# Altium PCB ATGuard SimpleV11.PcbDoc
Units mm, origin at the board's own origin, x right, y up, seen from the top; angles counter-clockwise.
Board outline 97 x 18.8 mm, 2 copper layers (Top Layer, Bottom Layer), stack 1.071 mm thick; 83 components, 47 nets, 263 pads, 90 vias.
Unrouted connection lines stored in the file: 12.
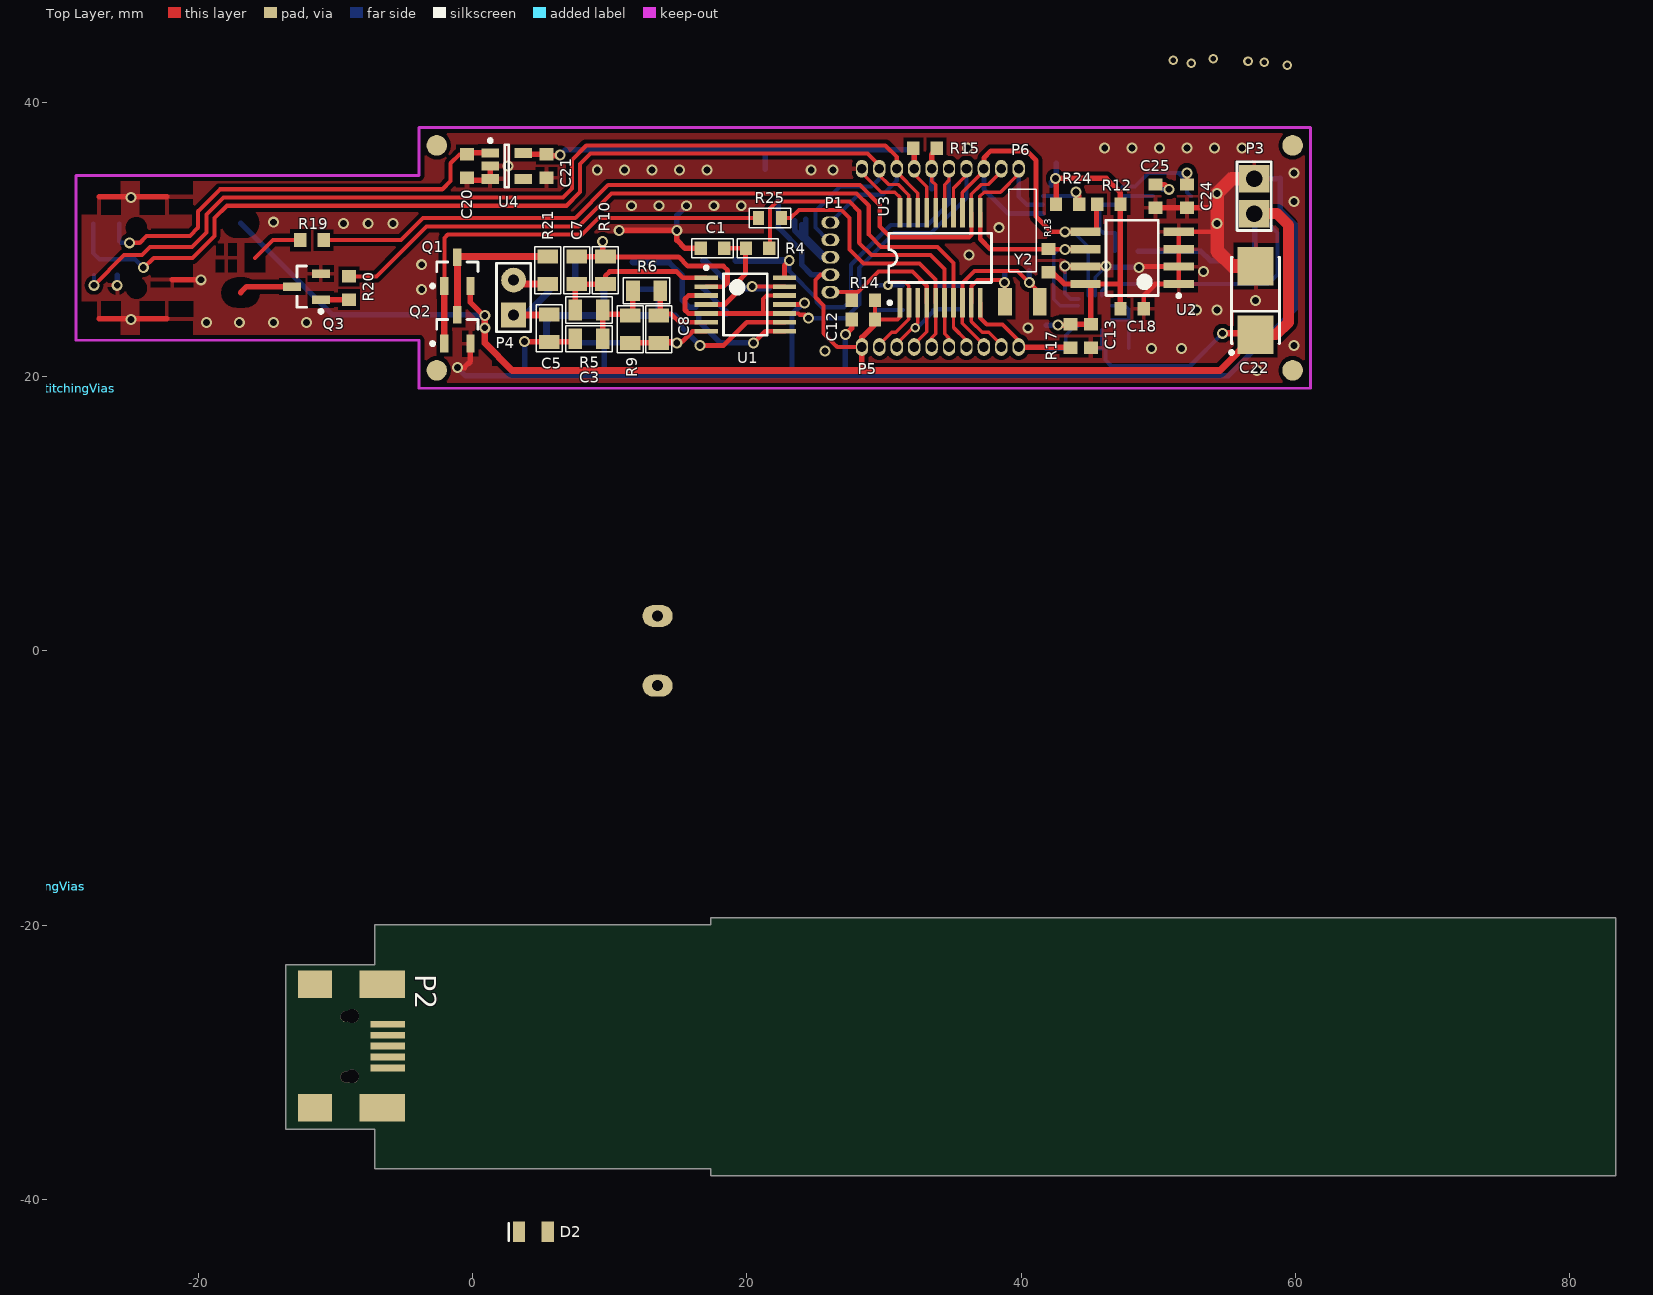
[diagram p0: Top Layer view]
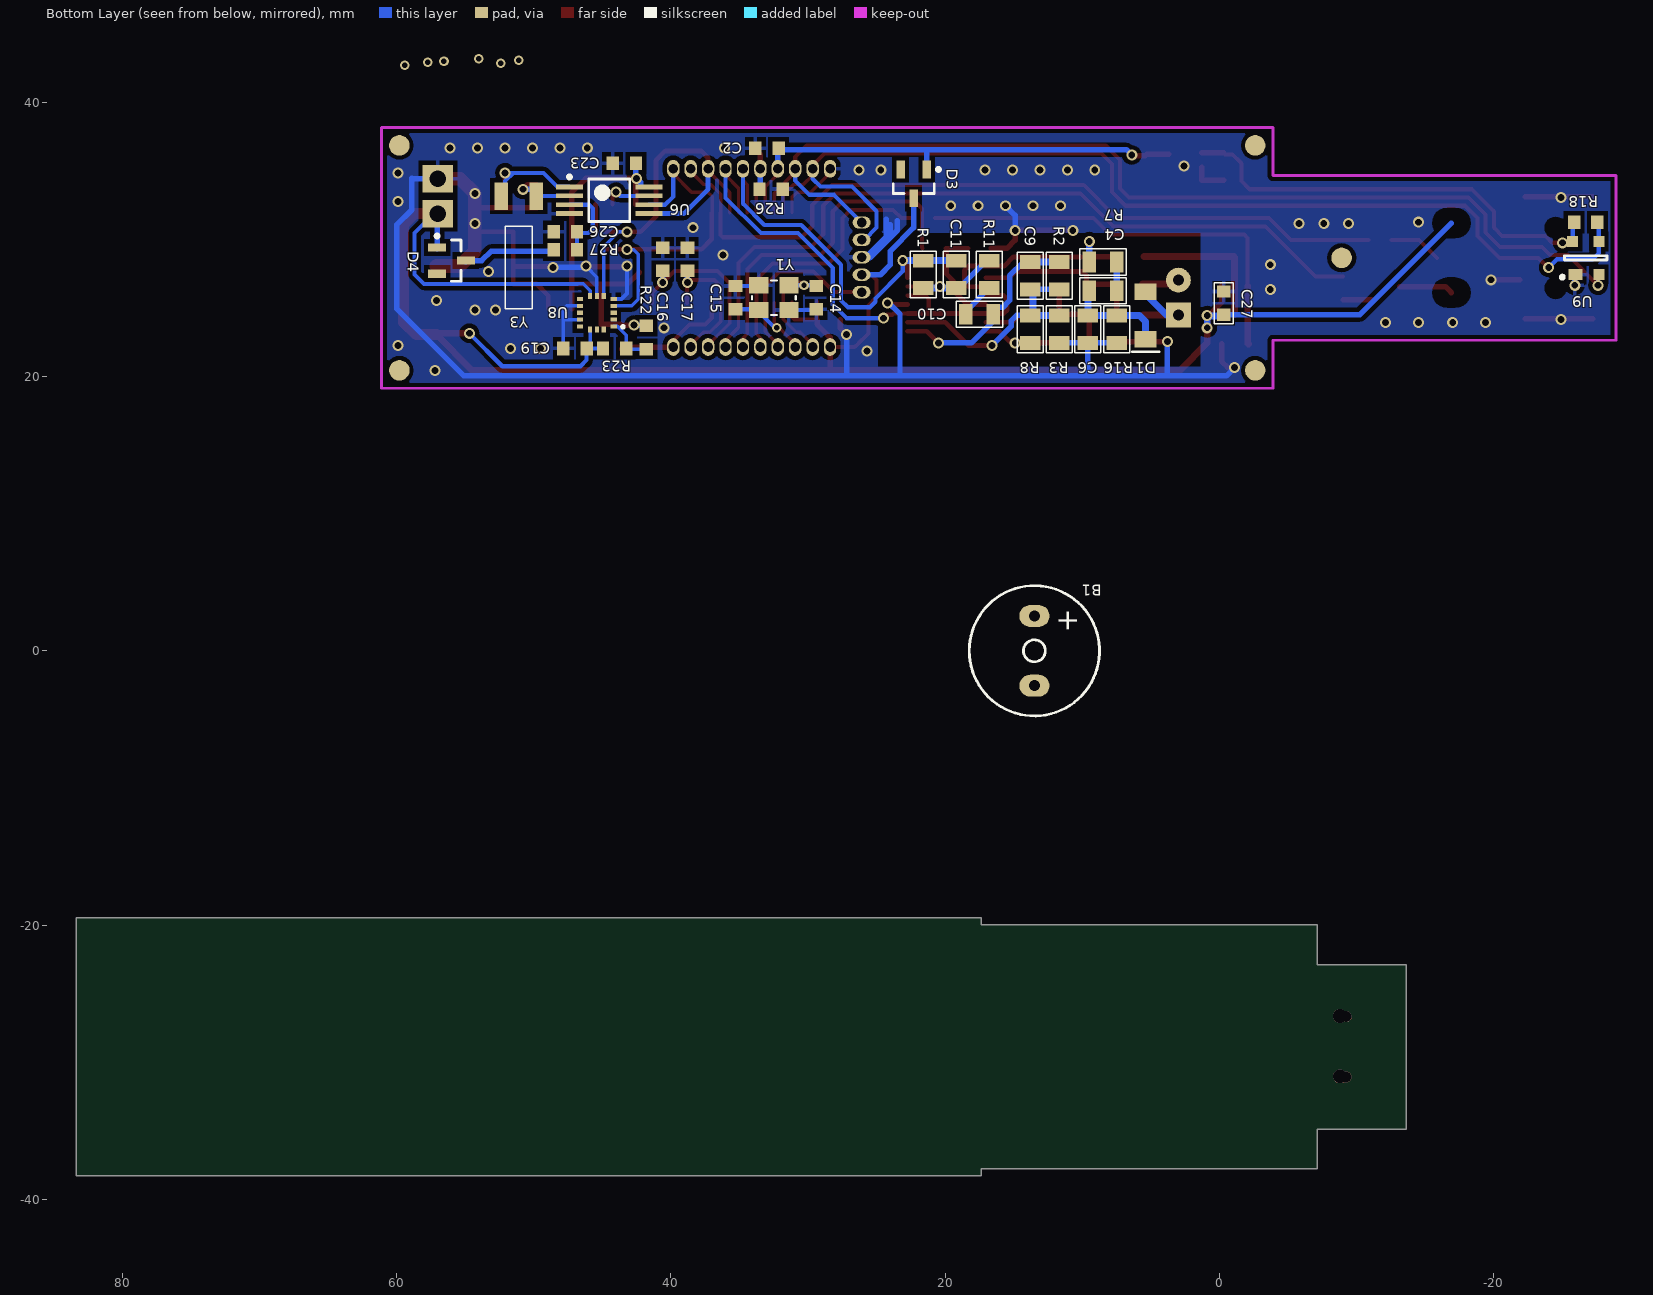
[diagram p1: Bottom Layer view, seen from below]

## Layer stack, top to bottom
Top Layer: signal copper 0.0356
Dielectric: core 1, FR-4, Dk 4.8
Bottom Layer: signal copper 0.0356

## Board outline
17.375,-37.775 17.375,-38.275 83.375,-38.275 83.375,-19.475 17.375,-19.475 17.375,-19.975 -7.125,-19.975 -7.125,-22.875 -13.625,-22.875 -13.625,-34.875 -7.125,-34.875 -7.125,-37.775

## Design rules (kind name [scope] priority, off if disabled: settings)
Clearance Clearance_1 [InNamedPolygon('Direct Connect 8') Or  InNamedPolygon('Direct Connect 1') Or  InNamedPolygon('Direct Connect 11') Or  InNamedPolygon('Direct Connect 4') Or  InNamedPolygon('Direct Connect 5') Or  InNamedPolygon('Direct Connect 7') Or  InNamedPolygon('Direct Connect 10') Or  InNamedPolygon('Direct Connect 9') Or  InNamedPolygon('Direct Connect 2') Or  InNamedPolygon('Direct Connect 6') Or  InNamedPolygon('Direct Connect 3')] p1: gap=0.25
Clearance StitchingVias-Internal [InComponent('StitchingVias') vs InComponent('StitchingVias')] p2: gap=0.3 // Clearance between Stitching Vias
Clearance StitchingVias-Electrical [InComponent('StitchingVias') vs OnSignal] p3: gap=0.3 // Clearance between Stitching Vias and Electrical Objects
Clearance StitchingVias-Board [InComponent('StitchingVias') vs OnLayer('Keep-Out Layer')] p4: gap=0.3 // Clearance between Stitching Vias and Board Outline
Clearance [All] p5: gap=0.3
ComponentClearance StitchingVias-Comp [InComponent('StitchingVias')] p1: gap=0 collisioncheckmode=3 verticalgap=0 showdistances=FALSE // Clearance between "StitchingVias" Component and other Components
ComponentClearance [All] p2: gap=0.254 collisioncheckmode=3 verticalgap=0.254 showdistances=FALSE
HoleSize [All] p1: absolutevalues=TRUE maxlimit=2.54 minlimit=0.2 maxpercent=80.000 minpercent=20.000
HoleToHoleClearance [All] p1: gap=0.1 allowstackedmicrovias=TRUE
MinimumSolderMaskSliver [All] p1: minsoldermaskwidth=0
NetAntennae [All] p1: netantennaetolerance=0.1
PlaneClearance [All] p1: clearance=0.25
PlaneConnect StitchingVias-Plane [InComponent('StitchingVias')] p1: planeconnectstyle=Direct reliefexpansion=0.508 reliefentries=4 reliefconductorwidth=0.254 reliefairgap=0.254 // Power plane connect style rule for Stitching Vias
PlaneConnect [All] p2: planeconnectstyle=Relief reliefexpansion=0.508 reliefentries=4 reliefconductorwidth=0.254 reliefairgap=0.254
PolygonConnect PolygonConnect_3 [All vs IsNamedPolygon('Direct Connect 8') Or  IsNamedPolygon('Direct Connect 1') Or  IsNamedPolygon('Direct Connect 11') Or  IsNamedPolygon('Direct Connect 4') Or  IsNamedPolygon('Direct Connect 5') Or  IsNamedPolygon('Direct Connect 7') Or  IsNamedPolygon('Direct Connect 10') Or  IsNamedPolygon('Direct Connect 9') Or  IsNamedPolygon('Direct Connect 2') Or  IsNamedPolygon('Direct Connect 6') Or  IsNamedPolygon('Direct Connect 3')] p1: connectstyle=Direct reliefconductorwidth=0.254 reliefentries=4 polygonreliefangle="90 Angle"
PolygonConnect PolygonConnect_2 [All vs IsNamedPolygon('Top VBAT') Or  IsNamedPolygon('Bottom VBAT') Or  IsNamedPolygon('Top VBAT')] p2: connectstyle=Direct reliefconductorwidth=0.254 reliefentries=4 polygonreliefangle="90 Angle"
PolygonConnect StitchingVias-Poly [InComponent('StitchingVias')] p3: connectstyle=Direct reliefconductorwidth=0.254 reliefentries=4 polygonreliefangle="90 Angle" // Polygon connect style rule for Stitching Vias
PolygonConnect PolygonConnect_1 [All vs IsNamedPolygon('Top Full')] p4: connectstyle=Relief reliefconductorwidth=0.254 reliefentries=4 polygonreliefangle="90 Angle"
PolygonConnect [All] p5: connectstyle=Relief reliefconductorwidth=0.3 reliefentries=4 polygonreliefangle="90 Angle"
RoutingVias StitchingVias-ViaStyle [InComponent('StitchingVias')] p1: holewidth=0.4 width=0.6 viastyle="Through Hole" minholewidth=0.3 minwidth=0.5 maxholewidth=0.6 maxwidth=1 // Via style rule for Stitching Vias
RoutingVias [All] p2: holewidth=0.4 width=0.7 viastyle="Through Hole" minholewidth=0.4 minwidth=0.7 maxholewidth=0.711 maxwidth=1.27
SilkToSilkClearance [All] p1: silktosilkclearance=0
SilkscreenOverComponentPads [All] p1: minsilkscreentomaskgap=0
SolderMaskExpansion [All] p1: expansion=0
TestPointUsage [All] p1: valid=0 allowmultiple=FALSE
Testpoint [All] p1: side=15 testpointundercomponent=TRUE minsize=1.016 maxsize=2.54 preferedsize=1.524 minholesize=0 maxholesize=1.016 preferedholesize=0.813 testpointgrid=0.025 style=1023 order=0123456789
Width [All] p1: maxlimit=1 minlimit=0.2 preferedwidth=0.3
15 further rules are at their usual default settings.

## Classes and differential pairs
component class "AT Guard Simple Main": B1 C1 C2 C12 C13 C14 C15 C16 C17 D2 P1 P2 P5 P6 Q3 R4 R12 R13 R14 R15 R17 R18 R19 R20 R26 U3 U9 Y1 Y2
component class "AT Guard Simple Memory": C18 U2
component class "AT Guard Simple Mems": C19 R22 R23 U8
component class "AT Guard Simple Power": C20 C21 C22 D3 P3 U4
component class "AT Guard Simple RTC": C23 C24 C25 C26 D4 R24 R27 U6 Y3
component class RF_125KHz: C3 C4 C5 C6 C7 C8 C9 C10 C11 C27 D1 P4 Q1 Q2 R1 R2 R3 R5 R6 R7 R8 R9 R10 R11 R16 R21 R25 U1

## Components (designator, comment, footprint, x,y, rotation, side; value= is the part's Value field where it differs from the comment)
B1 "Buzzer 5V r=12mm, h=7.5 mm" "Buzzer 9x5.5 mm" 13.5,0 r270 bottom
C1 "Cap" 3-0603_N#1 17.5,29.35 r0 top
C2 "Cap" 3-0603_L 33,36.65 r180 bottom
C3 "Cap" 6-0805_N 8.5,22.75 r0 top
C4 "Cap" 6-0805_N 8.5,26.25 r0 bottom
C5 "Cap" 6-0805_N 5.61,23.52 r270 top
C6 "Cap" 6-0805_N 9.6,23.45 r270 bottom
C7 "Cap" 6-0805_N 7.6,27.75 r270 top
C8 "Cap" 6-0805_N 13.6,23.45 r270 top
C9 "Cap" 6-0805_N 13.8,27.35 r90 bottom
C10 "Cap" 6-0805_N 17.5,24.55 r0 bottom
C11 "Cap" 6-0805_N 19.2,27.45 r90 bottom
C12 "Cap" 3-0603_L 28.5,24.15 r0 top
C13 "Cap" 3-0603_L 45.1,22.95 r90 top
C14 "Cap" 3-0603_L 29.4,25.75 r90 bottom
C15 "Cap" 3-0603_L 35.3,25.75 r270 bottom
C16 "Cap" 3-0603_L 40.6,28.55 r270 bottom
C17 "Cap" 3-0603_L 38.8,28.55 r270 bottom
C18 "Cap" 3-0603_L 48.1,24.95 r180 top
C19 "Cap" 3-0603_L 47,22.05 r0 bottom
C20 "Cap" 3-0603_L -0.4,35.35 r90 top
C21 "Cap" 3-0603_L 5.4,35.35 r90 top
C22 "CAP-Tantal" C 57.1,25.55 r90 top
C23 "Cap" 3-0603_L 43.4,35.55 r0 bottom
C24 "Cap" 3-0603_L 52.1,33.15 r90 top
C25 "Cap" 3-0603_L 49.8,33.15 r90 top
C26 "Cap" 3-0603_L 47.7,30.55 r180 bottom
C27 "Cap" 3-0603_N#1 -0.3,25.35 r270 bottom
D1 "LL4148" "DL-35 - S" 5.4,24.45 r270 bottom
D2 "LED" "6-0805 - LED" 4.45,-42.35 r180 top
D3 "BAT54C" SOT23_N 22.3,34.05 r270 bottom
D4 "BAT54C" SOT23_N 56,28.45 r180 bottom
P1 "Header 5pin" "Header 1.27mm 5P" 26.1,26.15 r90 top
P2 "USB Mini B" "USB Mini B Female_N 2" -8.775,-28.825 r270 top
P3 "Header 2H" "HDR1X2H-180 derece"#1 57,33.15 r90 top
P4 "Header 2H" "HDR1X2H-180 derece"#2 3,25.76 r90 top
P5 "Header 10" "Header 1.27mm 10P" 28.4,22.15 r0 top
P6 "Header 10" "Header 1.27mm 10P" 28.4,35.15 r0 top
Q1 "BSS84" SOT23_N -1.1,27.65 r90 top
Q2 "2N7002" SOT23_N -1.1,23.45 r90 top
Q3 "BC817-40" SOT23_N -12.1,26.55 r180 top
R1 "Res1" 6-0805_N 21.6,27.45 r90 bottom
R2 "Res1" 6-0805_N 11.7,27.35 r270 bottom
R3 "Res1" 6-0805_N 11.7,23.45 r270 bottom
R4 "Res1" 3-0603_N#1 20.8,29.35 r180 top
R5 "Res1" 6-0805_N 8.5,24.85 r180 top
R6 "Res1" 6-0805_N 12.7,26.25 r180 top
R7 "Res1" 6-0805_N 8.5,28.35 r180 bottom
R8 "Res1" 6-0805_N 13.8,23.45 r270 bottom
R9 "Res1" 6-0805_N 11.5,23.45 r90 top
R10 "Res1" 6-0805_N 9.7,27.75 r90 top
R11 "Res1" 6-0805_N 16.8,27.45 r90 bottom
R12 "Res1" 3-0603_L 46.4,32.55 r0 top
R13 "Res1" 3-0603_L 42,28.45 r270 top
R14 "Res1" 3-0603_L 28.5,25.55 r0 top
R15 "Res1" 3-0603_L 33,36.65 r180 top
R16 "Res1" 6-0805_N 7.5,23.45 r90 bottom
R17 "Res1" 3-0603_L 43.6,22.95 r90 top
R18 "Res1" 3-0603_L -26.7,31.25 r0 bottom
R19 "Res1" 3-0603_L -11.7,29.95 r0 top
R20 "Res1" 3-0603_L -9,26.45 r90 top
R21 "Res1" 6-0805_N 5.5,27.75 r270 top
R22 "Res1" 3-0603_L 41.8,22.85 r270 bottom
R23 "Res1" 3-0603_L 44.1,22.05 r180 bottom
R24 "Res1" 3-0603_L 43.4,32.55 r0 top
R25 "Res1" 3-0603_N#2 21.7,31.55 r180 top
R26 "Res1" 3-0603_L 32.7,33.65 r0 bottom
R27 "Res1" 3-0603_L 47.7,29.25 r180 bottom
StitchingVias "Component That Holds Stitching Vias" ? -28.9,19.15 r0 top locked
StitchingVias "Component That Holds Stitching Vias" ? -31.1,-17.15 r0 top locked
StitchingVias "Component That Holds Stitching Vias" ? -31.1,-17.15 r0 top locked
StitchingVias "Component That Holds Stitching Vias" ? -31.1,-17.15 r0 top locked
StitchingVias "Component That Holds Stitching Vias" ? -28.9,19.15 r0 top locked
U1 "#NAME?" TSSOP-14N 19.9,25.25 r0 top
U2 "24FC1025-I/SM" SOIJ-SM8_N 48.1,28.65 r180 top
U3 "PIC18LF14K50-I/SS" SSOP-20 34.1,28.65 r0 top
U4 "TPS76933 3.3V LDO" SOT-23-CH5_M 2.5,35.35 r0 top
U6 "MCP79402" TSSOP-ST8_M 44.5,32.85 r180 bottom
U8 "LIS3DH" "LGA 16" 45.4,24.65 r0 bottom
U9 "PRTR5V0U2X" SOT-143B -26.7,28.65 r270 bottom
Y1 "Crystal Oscillator" "3.2x2.5 mm SMD CRYSTAL" 32.5,25.75 r0 bottom
Y2 "XTAL_SMT" "32768 SMT 2.1x6.2mm Crystal" 40.1,25.45 r180 top
Y3 "XTAL_SMT" "32768 SMT 2.1x6.2mm Crystal" 51.1,33.15 r180 bottom

## Footprints (in the part's own frame and the unit in brackets; to place one, negate y for a bottom-side part, rotate by r counter-clockwise, add the part's x,y. Pads: shape width x height; smd on the part's side, far side on the other; paste and mask are expansions set on the pad)
3-0603_L [mm] "Chip Resistor; Body 1.6 x 0.9 mm (LxW typ)"
  rect 0.9x1 smd: 1(-0.85,0) 2(0.85,0)
  body extent -0.81,-0.41 0.81,0.41, height 0.46
3-0603_N#1 [mm] "Chip Resistor; Body 1.6 x 0.9 mm (LxW typ)"
  rect 0.9x1 smd: 1(-0.85,0) 2(0.85,0)
  silkscreen extent -1.5,-0.7 1.5,0.7, body extent -0.81,-0.41 0.81,0.41, height 0.46
3-0603_N#2 [mm] "Chip Resistor; Body 1.6 x 0.9 mm (LxW typ)"
  rect 0.8x1 smd: 1(-0.85,0) 2(0.85,0)
  silkscreen extent -1.5,-0.7 1.5,0.7, body extent -0.81,-0.41 0.81,0.41, height 0.46
"3.2x2.5 mm SMD CRYSTAL" [mm] "3.2x2.5 mm SMD CRYSTAL"
  rect 1.4x1.2 smd: 1(-1.1,-0.9) 2(1.1,-0.9) 3(1.1,0.9) 4(-1.1,0.9)
  silkscreen extent -1.6,-1.25 1.6,1.25, body extent -1.6,-1.25 1.6,1.25, height 0.77
"6-0805 - LED" [mm] "Chip LED"
  rect 0.9x1.5 smd: 1(-1.05,0) 2(1.05,0)
  silkscreen extent 1.8,-0.6 1.8,0.65, body extent -1.03,-0.45 1.03,0.46, height 0.85
6-0805_N [mm] "Chip Resistor; Body 2 x 1.2 mm (LxW typ)"
  rect 1x1.5 smd: 1(-1,0) 2(1,0)
  silkscreen extent -1.7,-0.95 1.7,0.95, body extent -1.01,-0.63 1.01,0.64, height 0.61
"32768 SMT 2.1x6.2mm Crystal" [mm] "32768 SMT 2.1x6.2mm Crystal"
  rect 1x2 smd: 1(-1.27,0) 2(1.27,0)
  silkscreen extent -1,-8.2 1,-2.2, body extent -1.53,-8.17 1.53,0.81, height 2
"Buzzer 9x5.5 mm" [mm]
  oval 1.6x2.2 hole 0.8: 1(-2.54,0) 2(2.54,0)
  silkscreen extent -4.75,-4.75 4.75,4.75, body extent -4.41,-4.52 4.59,4.48, height 4.5
C [mm] "Capacitor, SM Tantalum; Body 6.0 x 3.2 mm (LxW typ)"
  rect 2.8x2.6 smd: 1(-2.5,0) 2(2.5,0)
  silkscreen extent -3.92,-1.75 3.15,1.87, body extent -3.8,-1.75 3.79,1.76, height 2.79
"DL-35 - S" [mm]
  rect 1.2x1.6 smd: 1(-1.725,0) 2(1.725,0)
  silkscreen extent 2.64,-0.95 2.64,0.98, body extent -1.76,-0.75 1.74,0.75, height 1.5
"HDR1X2H-180 derece"#1 [mm] "Connector; Header; 2 Position; Right Angle"
  rect 2x2.2 hole 1.2: 1(-1.27,0) 2(1.27,0)
  silkscreen extent -2.5,-1.25 2.5,1.25, body extent -2.53,-1.28 2.55,1.26, height 8.49
"HDR1X2H-180 derece"#2 [mm] "Connector; Header; 2 Position; Right Angle"
  rect 1.8x1.8 hole 0.8: 1(-1.27,0)
  round 1.8 hole 0.8: 2(1.27,0)
  silkscreen extent -2.5,-1.25 2.5,1.25, body extent -2.53,-1.28 2.55,1.26, height 8.49
"Header 1.27mm 5P" [mm] "5 pin header 1.27mm"
  oval 0.9x1.3 hole 0.7: 1(0,0) 2(1.27,0) 3(2.54,0) 4(3.81,0) 5(5.08,0)
"Header 1.27mm 10P" [mm] "10 pin header 1.27mm"
  oval 0.9x1.3 hole 0.7: 1(0,0) 2(1.27,0) 3(2.54,0) 4(3.81,0) 5(5.08,0) 6(6.35,0) 7(7.62,0) 8(8.89,0) 9(10.16,0) 10(11.43,0)
"LGA 16" [mm] "LGA 16"
  rect 0.45x0.3 smd: 1(-1.225,1) 2(-1.225,0.5) 3(-1.225,0) 4(-1.225,-0.5) 5(-1.225,-1) 9(1.225,-1) 10(1.225,-0.5) 11(1.225,0) 12(1.225,0.5) 13(1.225,1)
  rect 0.3x0.45 smd: 6(-0.5,-1.225) 7(0,-1.225) 8(0.5,-1.225) 14(0.5,1.225) 15(0,1.225) 16(-0.5,1.225)
  silkscreen extent -2,0.93 -1.8,1.12, body extent -1.5,-1.5 1.5,1.5, height 1.01
SOIJ-SM8_N [mm] "SOP, 8-Leads, Body 5.2x5.2mm, Pitch 1.27mm, IPC Medium Density"
  rect 2.2x0.6 smd: 1(-3.4,1.905) 2(-3.4,0.635) 3(-3.4,-0.635) 4(-3.4,-1.905) 5(3.4,-1.905) 6(3.4,-0.635) 7(3.4,0.635) 8(3.4,1.905)
  silkscreen extent -3.52,-2.75 1.9,2.88, body extent -2.73,-2.75 2.73,2.75, height 2.04
SOT23_N [mm] "SOT23, 3-Leads, Body 2.9x1.3mm, Pitch 0.95mm, Lead Span 2.3mm, IPC Medium Density"
  rect 1.3x0.6 smd: 1(-1.05,0.95) 2(-1.05,-0.95) 3(1.05,0)
  silkscreen extent -1.17,-1.5 0.7,1.92, body extent -1.25,-1.5 1.25,1.5, height 1.05
SOT-23-CH5_M [mm] "SOT23, 6-Leads, Body 2.9x1.6mm, Pitch 0.95mm, Lead Span 2.7mm, IPC Low Density"
  rect 1.3x0.65 smd: 1(-1.2,0.95) 2(-1.2,0)
  rect 1.3x0.7 smd: 3(-1.2,-0.95) 4(1.2,-0.95) 5(1.2,0.95)
  silkscreen extent -1.32,-1.55 0.15,1.97, body extent -1.5,-1.49 1.5,1.51, height 1.3
SOT-143B [mm] "SOT143B"
  rect 0.8x1 smd: 1(1.22,-0.75)
  rect 0.8x0.8 smd: 2(1.2,0.95) 3(-1.2,0.95) 4(-1.2,-0.95)
  silkscreen extent -0.15,-1.84 1.53,1.55, body extent -1.21,-1.46 1.21,1.46, height 1
SSOP-20 [mm]
  rect 0.35x2.15 smd: 1(-2.925,-3.275) 2(-2.275,-3.275) 3(-1.625,-3.275) 4(-0.975,-3.275) 5(-0.325,-3.275) 6(0.325,-3.275) 7(0.975,-3.275) 8(1.625,-3.275) 9(2.275,-3.275) 10(2.925,-3.275) 11(2.925,3.275) 12(2.275,3.275) 13(1.625,3.275) 14(0.975,3.275) 15(0.325,3.275) 16(-0.325,3.275) 17(-0.975,3.275) 18(-1.625,3.275) 19(-2.275,3.275) 20(-2.925,3.275)
  silkscreen extent -3.8,-3.4 3.75,1.8, body extent -3.66,-3.95 3.66,3.95, height 1.78
TSSOP-14N [mm] "TSOP, 14-Leads, Body 4.5x4.3mm (max), Pitch 0.65mm, IPC Medium Density"
  rect 1.7x0.35 smd: 1(-2.85,1.95) 2(-2.85,1.3) 3(-2.85,0.65) 4(-2.85,0) 5(-2.85,-0.65) 6(-2.85,-1.3) 7(-2.85,-1.95) 8(2.85,-1.95) 9(2.85,-1.3) 10(2.85,-0.65) 11(2.85,0) 12(2.85,0.65) 13(2.85,1.3) 14(2.85,1.95)
  silkscreen extent -2.97,-2.25 1.6,2.8, body extent -3.2,-2.5 3.2,2.5, height 1.1
TSSOP-ST8_M [mm] "TSOP, 8-Leads, Body 3x4.4mm, Pitch 0.65mm, IPC Low Density"
  rect 2x0.35 smd: 1(-2.9,0.975) 2(-2.9,0.325) 3(-2.9,-0.325) 4(-2.9,-0.975) 5(2.9,-0.975) 6(2.9,-0.325) 7(2.9,0.325) 8(2.9,0.975)
  silkscreen extent -3.03,-1.55 1.5,1.82, body extent -3.14,-1.58 3.14,1.42, height 1.09
"USB Mini B Female_N 2" [mm] "USB Mini B Female Connector"
  round 1 hole 1 unplated: 0(-2.2,0) 0(2.2,0)
  rect 0.5x2.5 smd: 1(-1.6,2.6) 2(-0.8,2.6) 3(0,2.6) 4(0.8,2.6) 5(1.6,2.6)
  rect 2x3.3 smd: 6(-4.5,2.2) 6(4.5,2.2)
  rect 2x2.5 smd: 6(-4.5,-2.7) 6(4.5,-2.7)
  body extent -5.35,-5.89 5.35,3.3, height 3.95
? [mm]

## Part data
B1: library part Buzzer_
C1 C2 C3 C4 C5 C6 C7 C8 C9 C10 C11 C12 C13 C14 C15 C16 C17 C18 C19 C20 C21 C23 C24 C25 C26 C27: "Capacitor"
C22: "Tantamount Military, Surface Mount MIL-PRF-55365/8 Qualified Solid Tantalum Chip Capacitor: 6.8uF, 20% Tolerance, 6 WVDC @ +85°C, Surge = 8V"
D1: "1 Amp General Purpose Rectifier"
D2: "Typical INFRARED GaAs LED"
D3 D4: "2x200 mA Shottky Rectifier"
P1: library part "Header 5 pin", "Header 5-Pin"
P3 P4: "Header, 2-Pin, Right Angle"
P5 P6: "Header, 10-Pin"
Q1: "P-channel Enhancement Mode Vertical D-MOSFET"
Q2: "N-channel Enhancement Mode Field-effect Transistor"
Q3: "NPN General-purpose Transistor"
R1 R2 R3 R4 R5 R6 R7 R8 R9 R10 R11 R12 R13 R14 R15 R16 R17 R18 R19 R20 R21 R22 R23 R24 R25 R26 R27: "Resistor"
U1: library part LMV324IPWR, "IC OPAMP GP R-R 1MHZ 14TSSOP"
U2: "1 Mbit, 1MHz, 2.5V, I2C Serial EEPROM, 8-Pin SOIC 208mil, Industrial Temperature"
U3: "High Performance, Enhanced FLASH Microcontroller with 10-Bit A/D and nanoWatt Technology, 8K FLASH, 20-Pin SSOP, Standard Volt Range, Industrial Temperature"
U6: "MCP79402 RTC,I2C"
U8: "3-axis - ±2g analog output “nano” accelerometer"
U9: "Ultra low capacitance double rail-to-rail ESD protection diode"
Y2 Y3: "Crystal Oscillator"

## Free pads (board coordinates)
  round 1.5 smd far side mask+0.2: 0(-8.9,28.65) 0(-2.6,20.45) 0(-2.6,36.85) 0(59.8,20.45) 0(59.8,36.85)
  round 1.5 smd mask+0.2: 0(-2.6,20.45) 0(-2.6,36.85) 0(59.8,20.45) 0(59.8,36.85)
  round 0.8 hole 0.8: 1(-9.225,-31.075) 1(-9.225,-26.675)

## Via types
v1: diameter 0.8, hole 0.5, Top Layer to Bottom Layer, tented both sides, 81 vias
v2: diameter 0.7, hole 0.4, Top Layer to Bottom Layer, tented both sides, 8 vias
v3: diameter 0.8, hole 0.5, Top Layer to Bottom Layer, 1 vias

## Nets (pads, with @x,y where several pads share a name; then routed paths per layer and width w, separated by ;. In a path a pad name is that pad's centre, name@x,y a point inside that pad or via, vN(x,y) a via of type N, cw(c..) or ccw(c..) an arc to the next point about the centre after c; other vN are vias at no path point)
2: C14.2 P5.2 U3.2 Y1.1 | length 9.2
  Top Layer w0.25: P5.2 29.67,22.317 30.578,23.225 30.879,23.225 31.825,24.171 U3.2 31.825,26.625 31.575,26.875 30.525,26.875 v2(30.3,26.65)
  Bottom Layer w0.3: C14.2@29.45,26.65 Y1.1
3: C15.2 P5.3 U3.3 Y1.3 | length 7.4
  Top Layer w0.25: P5.3 30.94,22.39 32.475,23.925 U3.3
  Bottom Layer w0.3: v2(32.3,23.55) 32.4,23.55 33.6,24.75 Y1.3 ; Y1.3@33.95,24.9 C15.2@35.6,24.9
4: P1.1 P5.4 R14.1 U3.4 | length 12.9
  Top Layer w0.25: P5.4 32.21,22.36 33.125,23.275 U3.4
  Top Layer w0.3: P1.1 28.1,26.15 29.6,27.65 32.086,27.65 33.125,26.611 U3.4
5: P5.5 R25.1 U3.5 | length 20.1
  Top Layer w0.25: P5.5@33.5,22.15 P5.5 33.48,22.83 33.775,23.125 U3.5
  Top Layer w0.3: R25.1@22.45,31.55 23.2,31.55 23.8,32.15 26.9,32.15 27.5,31.55 27.5,29.25 28.5,28.25 32.6,28.25 33.775,27.075 U3.5
6: P5.6 R4.1 U3.6 | length 25
  Top Layer w0.25: U3.6 34.425,23.125 34.75,22.8 P5.6
  Top Layer w0.3: R4.1 21.7,29.4 21.7,32.236 22.214,32.75 27.5,32.75 28.2,32.05 28.2,29.75 29.1,28.85 33.4,28.85 34.425,27.825 U3.6
7: P5.7 R20.2 U3.7 | length 56.4
  Top Layer w0.25: U3.7 35.075,23.575 36.02,22.63 P5.7
  Top Layer w0.3: R20.2 -7.001,27.3 -3.351,30.95 7.749,30.95 10.149,33.35 28,33.35 28.9,32.45 28.9,30.35 29.8,29.45 33.9,29.45 35.075,28.275 U3.7
8: C16.2 P5.8 U3.8 Y2.1 | length 13.6
  Top Layer w0.25: U3.8 35.725,23.882 37.29,22.317 P5.8
  Top Layer w0.3: U3.8 35.725,26.81 36.615,27.7 39.75,27.7 41.37,26.08 Y2.1@41.37,25.35
  Bottom Layer w0.4: v1(40.6,26.85) C16.2
9: C17.2 P5.9 U3.9 Y2.2 | length 10.5
  Top Layer w0.25: U3.9 36.375,24.01 37.16,23.225 37.652,23.225 38.56,22.317 P5.9
  Top Layer w0.3: U3.9 36.375,26.611 36.814,27.05 38.5,27.05 38.83,26.72 Y2.2@38.83,25.35
  Bottom Layer w0.4: v1(38.8,26.85) C17.2@38.8,27.6
10: P5.10 R17.1 U3.10 | length 8.9
  Top Layer w0.3: U3.10 37.025,24.275 37.5,23.8 38.65,23.8 39.83,22.62 P5.10
  Top Layer w0.4: P5.10 43.45,22.15 R17.1@43.6,22
11: P6.10 R13.1 U2.6 U3.11 U6.6 U8.4 | length 25.3
  Top Layer w0.25: U3.11 37,31.95 37,33.137 37.313,33.45 38.5,33.45 39.83,34.78 P6.10
  Top Layer w0.35: U3.11 37.025,30.025 37.765,29.285 43.2,29.285 U2.6
  Bottom Layer w0.25: v1(43.2,29.25) 42.7,29.25 42.375,28.925 42.375,25.625 42.85,25.15 U8.4
  Bottom Layer w0.3: P6.10 39.83,33.12 40.425,32.525 U6.6 U6.6@41.575,32.55
12: P6.9 R19.2 U3.12 | length 59
  Top Layer w0.25: U3.12 36.375,33.29 37.085,34 37.613,34 P6.9@38.56,34.947
  Top Layer w0.3: R19.2 -5.2,29.95 -3.6,31.55 7.5,31.55 9.9,33.95 28.249,33.95 29.7,32.499 29.7,30.95 30.5,30.15 36.2,30.15 36.375,30.325 U3.12 36.375,30.425 ; P6.9@38.56,34.947 P6.9
13: P6.8 R12.1 U2.5 U3.13 U6.5 U8.6 | length 31.4
  Top Layer w0.25: U3.13 35.725,33.418 37.29,34.983 P6.8 P6.8@37.3,35.16
  Top Layer w0.35: P6.8@37.3,35.16 37.3,35.95 37.8,36.45 40.4,36.45 41.1,35.75 41.1,31.65 42.2,30.55 v1(43.2,30.55) U2.5@44.695,30.55 ; U2.5@45.5,30.55 R12.1@45.5,32.55
  Bottom Layer w0.25: v1(43.2,30.55) 43.8,30.55 44.9,29.45 44.9,28.55 U8.6
  Bottom Layer w0.35: P6.8 37.29,33.66 39.075,31.875 U6.5
14: P6.7 U1.3 U1.5 U1.10 U1.12 U3.14 | length 37.1
  Top Layer w0.25: U3.14 35.075,33.725 36.02,34.67 P6.7
  Top Layer w0.3: 21.2,24.6 21.2,25.65 21.45,25.9 U1.12 U1.12@22.725,25.875 ; U1.10 23.773,24.6 23.868,24.505 24.245,24.505 v1(24.5,24.25)
  Top Layer w0.35: 16.003,24.6 15.75,24.6 ; U1.3 15.75,25.9 15.5,25.65 15.5,24.85 15.75,24.6 ; U1.10 21.2,24.6 U1.5 15.75,24.6
  Bottom Layer w0.3: v1(24.5,24.25) 27.2,24.25 28.2,25.25 28.2,27.901 30.749,30.45 33.449,30.45 36.02,33.021 P6.7
15: C11.2 P6.6 R1.2 U1.14 U3.15 | length 29.5
  Top Layer w0.25: U3.15 34.425,33.975 34.75,34.3 P6.6
  Top Layer w0.35: U1.14 22.75,28.1 v1(23.1,28.45)
  Bottom Layer w0.3: v1(23.1,28.45) 23.1,27.677 25.1,25.677 ; 25.1,25.65 25.1,25.45 25.5,25.05 27.1,25.05 27.6,25.55 27.6,28.15 30.5,31.05 33.2,31.05 34.75,32.6 P6.6
  Bottom Layer w0.5: C11.2 R1.2 v1(23.1,28.45)
16: P6.5 R15.1 R26.2 U3.16 | length 6.2
  Top Layer w0.25: P6.5 33.5,35.13 33.5,34.25 33.775,33.975 ; U3.16@33.775,32.025 33.775,33.95
  Top Layer w0.4: P6.5 33.48,36.18 R15.1@33.85,36.55
  Bottom Layer w0.4: R26.2@33.48,33.68 P6.5
18: P1.5 P2.2 P6.3 U3.18 U9.2 | length 77.5
  Top Layer w0.25: P6.3 30.94,34.91 32.475,33.375 U3.18
  Top Layer w0.3: v1(-27.6,26.65) -25.4,28.85 -24.1,28.85 -23.5,29.45 -21.9,29.45 -20.449,29.45 -19.4,30.499 -19.4,31.799 -18.149,33.05 6.6,33.05 7.25,33.7 7.25,35.8 ; 7.25,35.798 7.25,35.8 ; P6.3 30.94,36.01 30.1,36.85 8.3,36.85 7.25,35.8
  Bottom Layer w0.3: v1(-27.6,26.65) U9.2@-27.6,27.4 ; P1.5 28.12,33.25 29.9,33.25 30.94,34.29 P6.3
19: P1.4 P2.3 P6.2 R18.1 U3.19 U9.3 | length 79.7
  Top Layer w0.25: P6.2 29.67,34.68 30.35,34 31.05,34 31.825,33.225 U3.19
  Top Layer w0.3: v1@-24.2,27.95 v1(-24,27.95) -23.936,27.95 -23.236,28.65 -21.9,28.65 -20.4,28.65 -18.8,30.25 -18.8,31.55 -17.9,32.45 6.849,32.45 7.85,33.451 7.85,35.5 8.6,36.25 28.8,36.25 29.67,35.38 P6.2
  Bottom Layer w0.3: R18.1@-27.65,31.15 U9.3 -27.65,29 -27.2,28.55 -24.6,28.55 v1(-24,27.95) ; P1.4 25.897,29.96 25,30.857 25,32.05 26.8,33.85 29.1,33.85 29.67,34.42 P6.2
+VBAT: B1.1 C12.2 C19.1 C22.1 C27.2 D3.3 D4.1 P1.2 P3.1 P5.1 Q1.2 R14.2 R23.1 U3.1 U8.8 U8.14 | length 158.6
  Top Layer w0.3: P1.2 25.37,27.42 25,27.05 25,25.777 25.6,25.177 25.6,23.15 26.05,22.7 26.052,22.7 26.55,22.202 26.55,22.2 26.6,22.15 P5.1 ; R14.2@29.35,25.45 C12.2 ; U3.1 31.175,24.334 30.991,24.15 C12.2@29.383,24.15 ; C12.2 C12.2@29.383,24.15 ; C12.2 29.35,24.117 C12.2@29.383,24.15
  Top Layer w0.4: Q1.2 -0.15,25.4 v1@0.9,24.35 ; 28.4,20.45 P5.1 28.4,22.85 29.35,23.8 C12.2@29.35,24.117
  Top Layer w0.5: v1@0.9,24.35 v1(0.9,23.55) 0.9,22.45 2.9,20.45 28.4,20.45 54.5,20.45 C22.1 57,23.15 v1(54.7,23.15)
  Top Layer w0.8: P3.1 58.67,31.88 59.5,31.05 59.5,23.95 58.6,23.05 C22.1
  Bottom Layer w0.25: C19.1@45.9,22.3 U8.14 ; U8.8 45.9,26.25 46.4,26.75 46.8,26.75
  Bottom Layer w0.3: R23.1 C19.1 46.15,21.2 46.6,20.75 52.3,20.75 v1(54.7,23.15) ; 46.8,26.75 58,26.75 58.7,27.45 58.7,30.45 57.32,31.83 P3.1@57.05,31.83
  Bottom Layer w0.4: -16.9,31.19 -10.21,24.5 C27.2 C27.2@-0.2,24.5 ; D3.3 22.3,30.85 24,29.15 24,28.15 24.73,27.42 P1.2 ; D4.1@57.05,29.3 D4.1 P3.1@57.05,31.83
  Bottom Layer w0.5: C27.2@-0.2,24.4 v1@0.9,24.4 ; v1(0.9,23.55) v1@0.9,24.4 ; v1(0.9,24.45) v1@0.9,24.4
+VCCI2C: C13.2 C18.2 C23.1 R12.2 R13.2 R17.2 R22.1 R24.1 U2.8 U6.8 | length 28.4
  Top Layer w0.4: R13.2@42.3,27.6 43.155,26.745 U2.8 47.2,26.745 ; R24.1 42.55,34.3 42.7,34.45 46.2,34.45 47.25,33.4 R12.2 C18.2 ; v1(42.7,23.75) R17.2@43.55,23.75 ; R17.2 C13.2 U2.8@45.1,26.65
  Bottom Layer w0.4: R22.1@41.85,23.75 v1(42.7,23.75) ; U6.8@42.2,33.95 42.2,34.15 v1(42.5,34.45) ; v1@42.55,34.5 C23.1
+VCCRF: C1.2 R4.2 U1.4 | length 7.7
  Top Layer w0.35: U1.4 18.4,25.25 19.4,26.25 19.4,26.95 19.9,27.45 R4.2@19.9,29.35 ; C1.2 R4.2@19.9,29.35 ; R4.2 R4.2@19.9,29.35
+VUSB: C2.2 C21.2 D3.1 P6.4 R15.2 U3.17 U4.5 | length 36.2
  Top Layer w0.25: P6.4 32.21,34.74 33.125,33.825 U3.17
  Top Layer w0.4: U4.5@3.7,36.2 C21.2@5.3,36.2 ; C21.2@5.4,36.1 v1@6.35,36.1 ; R15.2@32.2,36.5 32.2,35.16 P6.4
  Bottom Layer w0.4: v1(6.4,36.15) 6.8,36.55 32.1,36.55 32.21,36.44 P6.4 ; D3.1 21.35,36.5
GND: C1.1 C2.1 C3.1 C5.2 C6.2 C12.1 C13.1 C14.1 C15.1 C16.1 C17.1 C18.1 C19.2 C20.1 C21.1 C22.2 C23.2 C24.1 C25.1 C26.1 C27.1 D2.2 P1.3 P2.5 P2.6 P3.2 P6.1 Q2.2 Q3.2 R3.2 R16.1 R26.1 U1.11 U2.1 U2.2 U2.3 U2.4 U2.7 U3.20 U4.2 U4.3 U6.4 U8.5 U8.7 U8.10 U8.12 U9.1 Y1.2 Y1.4 | length 187.4
  Top Layer w0.25: P6.1 28.4,34.85 29.8,33.45 30.8,33.45 31.175,33.075 U3.20
  Top Layer w0.35: U1.11 v1@24,25.25 ; v1@48.665,28.015 U2.2 ; C18.1 48.95,25.9 49.795,26.745 U2.1 U2.2 ; 54.205,30.555 U2.4 U2.3 U2.2
  Top Layer w0.4: -27.2,24.2 -22.3,24.2 ; -27.2,33.1 -22.3,33.1 ; -21.9,27.05 v1(-19.8,27.05) ; v1(-1.1,20.65) -0.6,20.65 -0.15,21.1 Q2.2 ; C20.1@-0.3,34.3 1.3,34.3 U4.2@1.3,35.25 ; v3(3.8,22.55) C5.2@5.58,22.55 ; C5.2 C3.1@7.27,22.52 ; v1(10.7,30.65) v1(14.9,30.65) 14.9,29.95 15.5,29.35 C1.1 ; v1(27.2,23.05) 27.65,23.5 C12.1 ; v1@43.235,28.015 U2.7 46.165,28.015 v1(46.2,28.05) ; C25.1 C24.1 54.25,32.3
  Top Layer w1: P3.2 55.37,34.42 v1(54.3,33.35) 54.3,32.35 54.3,29.15 55.4,28.05 C22.2
  Bottom Layer w0.25: U8.7 45.4,27.25 v1@46.1,27.95 ; U8.12 47.85,24.15 ; U8.10 47.6,25.15 47.85,24.9 C19.2
  Bottom Layer w0.3: C14.1@29.45,24.85 Y1.4 ; Y1.2@33.95,26.6 C15.1@35.6,26.6 ; v1(43.2,28.05) 43.2,26.05 43.6,25.65 U8.5
  Bottom Layer w0.4: v1(-25.9,26.65) U9.1@-25.9,27.38 ; v1(-1.1,20.65) -0.5,20.05 27.2,20.05 ; 3.8,20.15 v3(3.8,22.55) ; R16.1 C6.2 ; 9.6,20.35 C6.2 ; R3.2 C6.2 ; v1(14.9,30.65) 14.9,31.75 v1(15.6,32.45) ; 23.3,20.15 23.3,24.55 24.2,25.45 24.22,25.43 v1(24.22,25.355) ; 23.5,31.35 23.5,30.65 25.5,28.65 26.06,28.65 P1.3 25.826,28.69 24,30.516 24,31.05 ; 24.3,30.05 24.3,31.45 ; v1(27.2,23.05) 27.2,20.05 ; v1@46.1,27.95 v1(48.6,27.95) ; P3.2 58.87,34.42 58.9,34.45 58.9,32.15 60,31.05 60,24.95 55.1,20.05 27.2,20.05
  other v1: 57.2,20.45 25.7,21.85 49.5,22.05 51.7,22.05 59.9,22.25 40.5,23.55 -19.4,23.95 -17,23.95 -14.5,23.95 -12.1,23.95 -24.9,24.15 52.8,24.85 54.3,24.85 57.1,25.55 -3.7,26.35 53.3,27.65 -3.7,28.15 36.2,28.85 38.4,30.85 -9.4,31.15 -7.6,31.15 -5.8,31.15 54.3,31.15 -14.5,31.25 11.6,32.45 13.6,32.45 17.6,32.45 19.6,32.45 59.9,32.75 -24.9,33.05 59.9,34.85 9.1,35.05 11.1,35.05 13.1,35.05 15.1,35.05 17.1,35.05 24.7,35.05 26.3,35.05 2.6,35.35 36.1,36.65 46.1,36.65 48.1,36.65 50.1,36.65 52.1,36.65 54.1,36.65 56.1,36.65
NetB1_2: B1.2 Q3.3 | length 3.9
  Top Layer w0.4: -16.9,26.11 -16.46,26.55 Q3.3
NetC3_2: C3.2 R5.1 R6.2 R9.2 | length 5.3
  Top Layer w0.4: C3.2 R5.1 ; R5.1@9.8,24.55 11.3,24.55 R9.2@11.4,24.45 ; R9.2@11.7,24.45 R6.2@11.7,26.05
NetC4_1: C4.1 R7.2 | length 2.2
  Bottom Layer w0.4: R7.2@7.48,28.35 R7.2@7.48,28.5
  Bottom Layer w0.5: C4.1 R7.2
NetC4_2: C4.2 C6.1 D1.2 R16.2 | length 8
  Bottom Layer w0.4: C6.1@9.36,24.45 C6.1@9.48,24.57 ; C4.2@9.48,26.25 C4.2@9.48,26.6
  Bottom Layer w0.5: D1.2 5.4,24.01 5.84,24.45 R16.2 9.36,24.45 C6.1 9.6,26.15 C4.2
NetC5_1: C5.1 D1.1 P4.1 | length 6
  Top Layer w0.4: C5.1@5.58,24.49 C5.1
  Top Layer w0.5: P4.1 C5.1@5.58,24.49
  Bottom Layer w0.4: D1.1@5.512,26.138 D1.1@5.62,26.245
  Bottom Layer w0.5: P4.1 3.865,24.49 D1.1@5.512,26.138
NetC7_1: C7.1 R7.1 R10.2 U1.2 | length 16.7
  Top Layer w0.35: R10.2@9.42,28.72 15.03,28.72 15.7,28.05 18.3,28.05 18.6,27.75 18.6,26.85 18.3,26.55 18.097,26.55 U1.2
  Top Layer w0.4: C7.1@7.52,28.72 R10.2@9.42,28.72 ; R10.2@9.45,28.75 9.5,28.8 v1@9.5,29.95
  Bottom Layer w0.4: R7.1@9.48,28.5 R7.1@9.5,28.52
  Bottom Layer w0.5: R7.1@9.5,28.52 v1@9.5,29.95
  other v1: 9.5,29.85
NetC7_2: C7.2 R5.2 R10.1 U1.1 | length 12.2
  Top Layer w0.35: R10.1 9.7,27.35 10,27.65 14.9,27.65 15.35,27.2 U1.1
  Top Layer w0.4: R5.2 7.5,26.7 7.52,26.72 9.42,26.72 R10.1@9.57,26.72
NetC8_1: C8.1 R6.1 U1.6 | length 5.5
  Top Layer w0.35: C8.1@13.3,24.45 C8.1@13.4,24.35 ; C8.1@13.3,24.55 14.5,24.55 15.1,23.95 U1.6
  Top Layer w0.4: C8.1@13.7,24.55 R6.1@13.7,25.95
NetC8_2: C8.2 R8.2 R9.1 U1.7 | length 9.3
  Top Layer w0.35: C8.2@13.3,22.55 15.3,22.55 16.05,23.3 U1.7
  Top Layer w0.4: R9.1@11.4,22.45 13.1,22.45 13.3,22.25 13.9,22.25 14.1,22.45 v1(14.9,22.45)
  Bottom Layer w0.4: R8.2@13.6,22.75 R8.2@13.9,22.45 ; R8.2 R8.2@13.9,22.45 ; v1(14.9,22.45) R8.2@13.9,22.45
NetC9_1: C9.1 R2.2 R3.1 R8.1 U1.9 | length 16.6
  Top Layer w0.35: v1(16.6,22.25) 18.3,22.25 20,23.95 U1.9
  Bottom Layer w0.4: R3.1@11.7,24.75 R3.1@12,24.45 ; R2.2 C9.1@13.6,26.35 ; R8.1@13.7,24.45 R8.1@13.8,24.55 ; R8.1 14.8,24.45 15.2,24.05 15.2,23.65 v1(16.6,22.25)
  Bottom Layer w0.5: R3.1@12,24.45 R8.1@13.7,24.45 ; R8.1@13.6,24.75 C9.1@13.6,26.35
NetC9_2: C9.2 C10.1 R2.1 U1.8 | length 14.8
  Top Layer w0.35: v1(20.5,22.45) 21.35,23.3 U1.8
  Bottom Layer w0.4: C9.2@14.3,28.35 15.3,27.35 15.3,25.55 15.8,25.05 C10.1@16.3,25.05 ; C10.1 16.5,24.05 18.1,22.45 v1(20.5,22.45)
  Bottom Layer w0.5: R2.1 C9.2@14.3,28.35
NetC10_2: C10.2 R11.1 | length 2.6
  Bottom Layer w0.4: R11.1 18.5,24.75 C10.2
NetC11_1: C11.1 R1.1 R11.2 U1.13 | length 7.8
  Top Layer w0.3: v1(20.4,26.55) U1.13
  Bottom Layer w0.4: R11.2 17,28.45 19,26.45 C11.1@19.05,26.45
  Bottom Layer w0.5: C11.1 R1.1
NetC20_2: C20.2 P2.1 R18.2 U4.1 U9.4 | length 32.7
  Top Layer w0.3: v1@-24.6,29.75 v1(-25,29.75) -24.256,29.75 -23.757,30.25 -21.9,30.25 -20.6,30.25 -20,30.85 -20,32.047 -18.397,33.65 -2.2,33.65 -1.6,34.25 -1.6,35.55 -0.95,36.2 C20.2
  Top Layer w0.4: C20.2@-0.3,36.3 U4.1
  Bottom Layer w0.3: U9.4 R18.2@-25.75,31.15 ; U9.4@-25.65,29.75 v1(-25,29.75)
NetC24_2: C24.2 U6.1 Y3.1 | length 8
  Top Layer w0.4: C24.2 v1(52.1,34.85)
  Bottom Layer w0.3: U6.1 47.425,33.85 48.3,33.85 49.3,34.85 51.5,34.85 ; v1(52.1,34.85) 51.5,34.85 ; Y3.1 52.1,33.42 52.1,34.25 51.5,34.85
NetC25_2: C25.2 U6.2 Y3.2 | length 3.8
  Top Layer w0.4: C25.2 50.45,34 v1(50.8,33.65)
  Bottom Layer w0.3: U6.2 Y3.2@49.605,33.175
  Bottom Layer w0.4: Y3.2@50.33,33.65 v1(50.8,33.65)
NetC26_2: C26.2 R27.2 U6.3 | length 5.9
  Bottom Layer w0.3: R27.2@46.85,29.15 46.85,30.45 46,30.45 45.7,30.75 45.7,32.25 45.975,32.525 U6.3
NetD2_1: D2.1 R19.1 | length 3.8
  Top Layer w0.3: -15.85,28.65 -14.55,29.95 R19.1
NetD4_3: D4.3 R27.1 | length 6.8
  Bottom Layer w0.4: R27.1@48.55,29.15 53.1,29.15 53.8,28.45 D4.3@54.85,28.45 ; D4.3@54.95,28.35 D4.3@54.85,28.45 ; D4.3 D4.3@54.85,28.45
NetP4_2: P4.2 R21.2 | length 2.3
  Top Layer w0.5: P4.2@3.29,26.74 R21.2@5.61,26.74
NetQ1_1: Q1.1 Q2.1 R25.2 | length 31.2
  Top Layer w0.3: Q1.1 -2.05,30.1 -1.8,30.35 8,30.35 9.2,31.55 R25.2@20.75,31.55
  Top Layer w0.5: Q2.1@-2.1,22.35 Q2.1@-2.1,22.4 ; Q2.1 Q1.1
NetQ1_3: Q1.3 Q2.3 R21.1 | length 10.7
  Top Layer w0.5: Q2.3 Q1.3 ; Q1.3@-1.05,28.75 R21.1
NetQ3_1: Q3.1 R20.1 | length 2
  Top Layer w0.4: Q3.1 R20.1
NetR22_2: R22.2 R23.2 U8.1 | length 3.5
  Bottom Layer w0.25: R22.2 R23.2@43.2,22 ; R23.2 43.25,23 43.9,23.65 U8.1
NetR24_2: R24.2 U6.7 | length 3.5
  Top Layer w0.3: v1(44,33.45) 44.25,33.2 R24.2
  Bottom Layer w0.3: U6.7 43.725,33.175 v1(44,33.45)
pads on no net: D3.2 D4.2 P2.0 P2.4 U4.4 U8.2 U8.3 U8.9 U8.11 U8.13 U8.15 U8.16
copper on no net:
  other v2: 59.4,42.69 52.41,42.85 57.74,42.9 56.55,43 51.11,43.05 54.01,43.16

## Polygon pours and split planes (outlines as drawn)
GND on Top Layer "Bottom Layer-No Net" (solid, pour order 1000): -28.9,34.65 -3.9,34.65 -3.9,38.15 61.1,38.15 61.1,19.15 24.9,19.15 24.9,30.45 1.4,30.45 1.4,20.75 24.9,20.75 24.9,19.15 -3.9,19.15 -3.9,22.65 -28.9,22.65
GND on Bottom Layer "Bottom Layer-No Net" (solid, pour order 1001): -28.9,34.65 -3.9,34.65 -3.9,38.15 61.1,38.15 61.1,19.15 24.9,19.15 24.9,30.45 1.4,30.45 1.4,20.75 24.9,20.75 24.9,19.15 -3.9,19.15 -3.9,22.65 -28.9,22.65

## Keep-outs
Keep-Out Layer:
  lines w0.2: -28.9,22.65 -3.9,22.65 -3.9,19.15 61.1,19.15 61.1,38.15 -3.9,38.15 -3.9,34.65 -28.9,34.65 -28.9,22.65

## Text inside footprints (layer, text, board x,y; h text height)
B1: Bottom Overlay "+" at 11.732,3.055 h1.52 r90